# Altium PCB PCB_conectores.PcbDoc
Units mil, origin at the board's own origin, x right, y up, seen from the top; angles counter-clockwise.
Board outline 1968.5 x 1968.5 mil, 2 copper layers (Top Layer, Bottom Layer); 17 components, 10 nets, 60 pads, 18 vias.
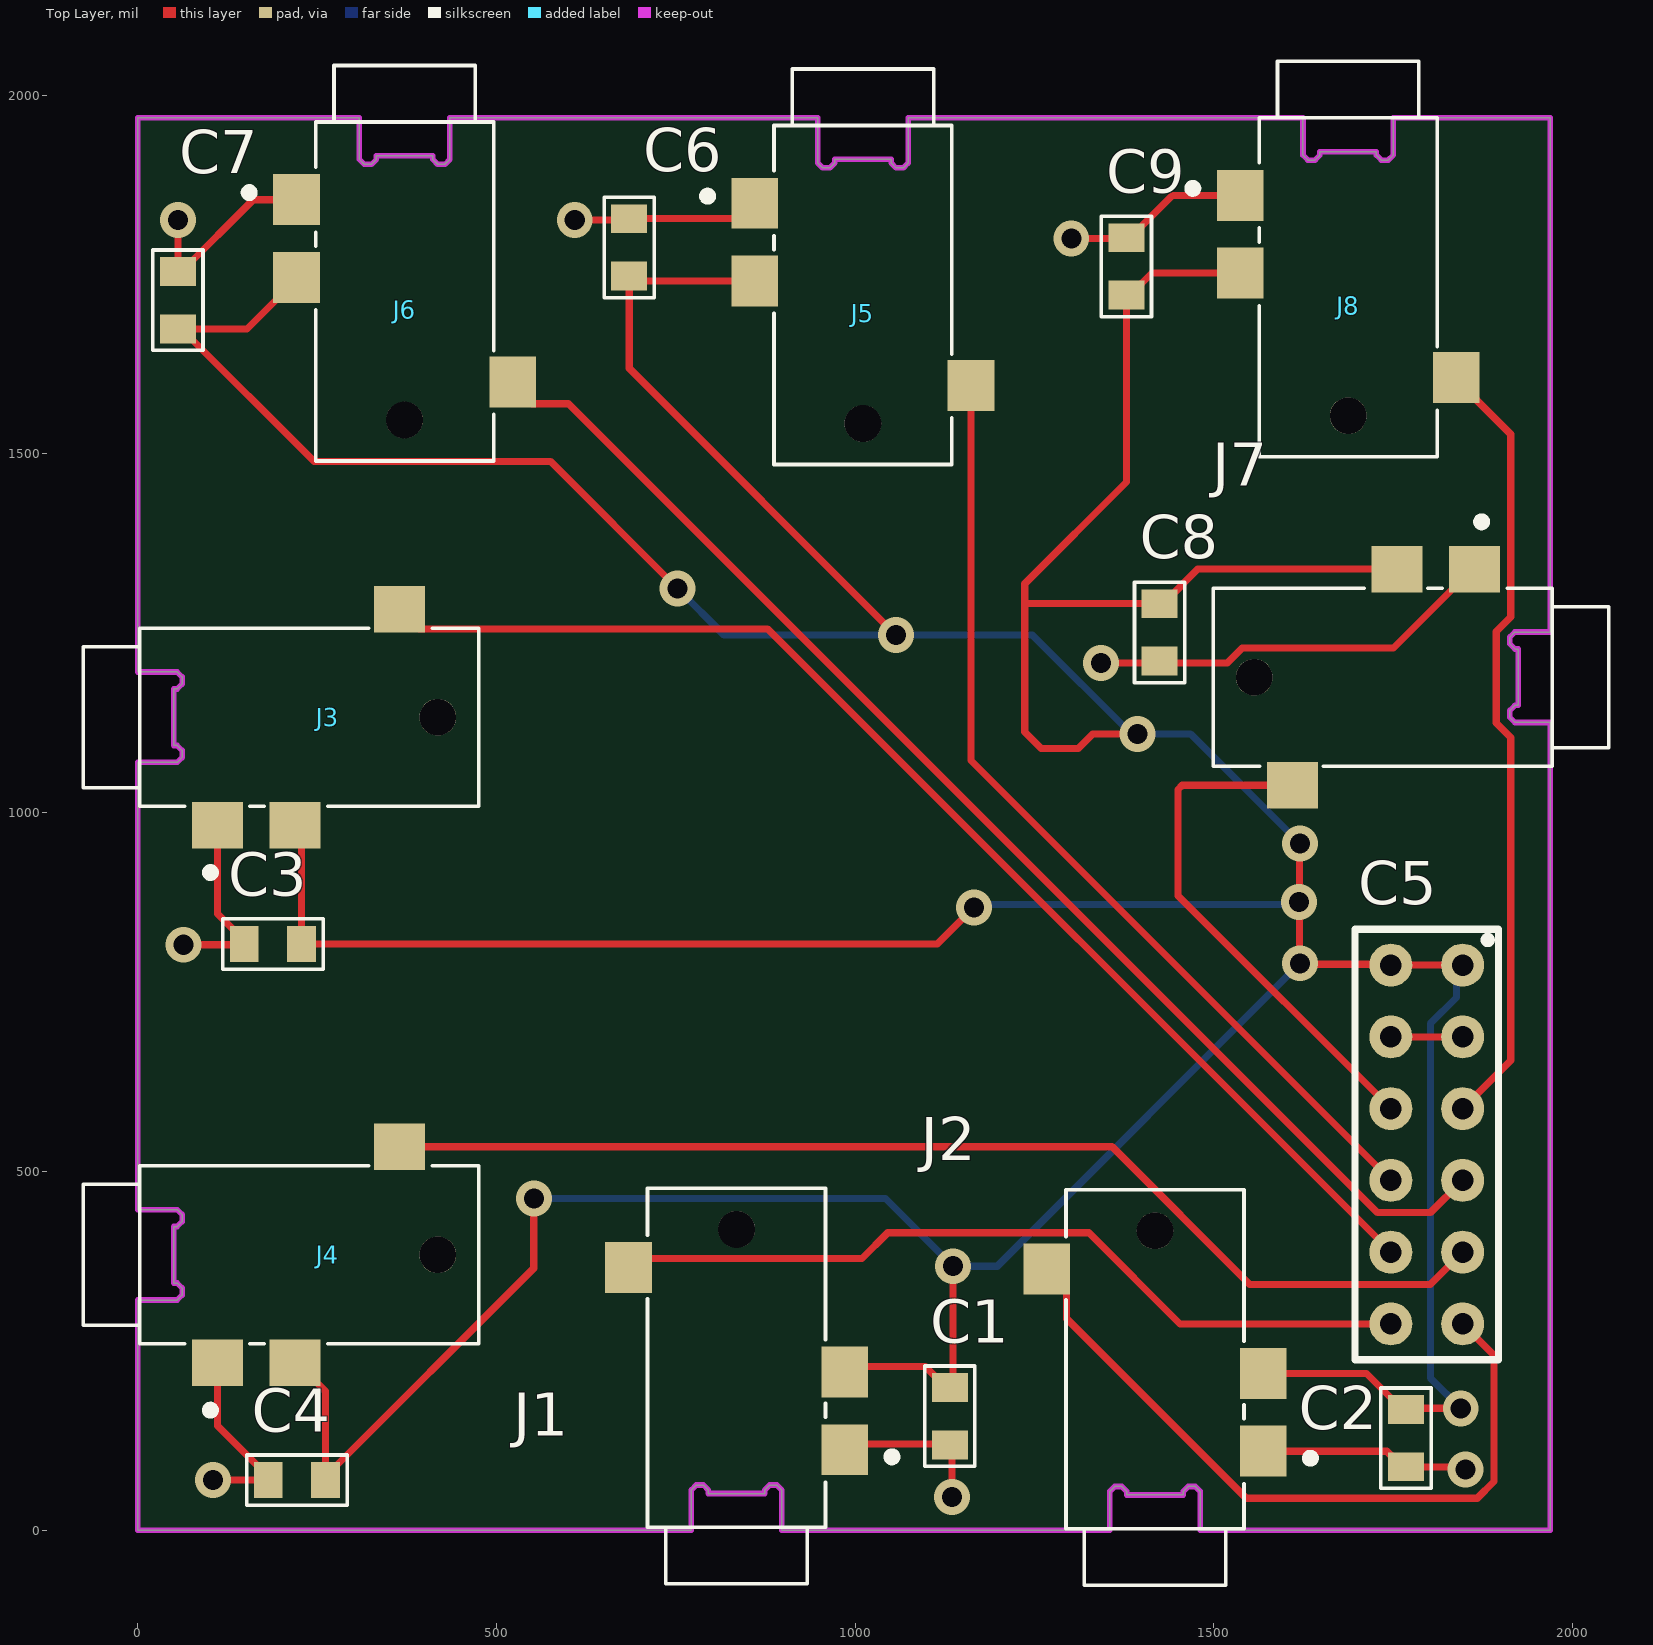
[diagram p0: Top Layer view]
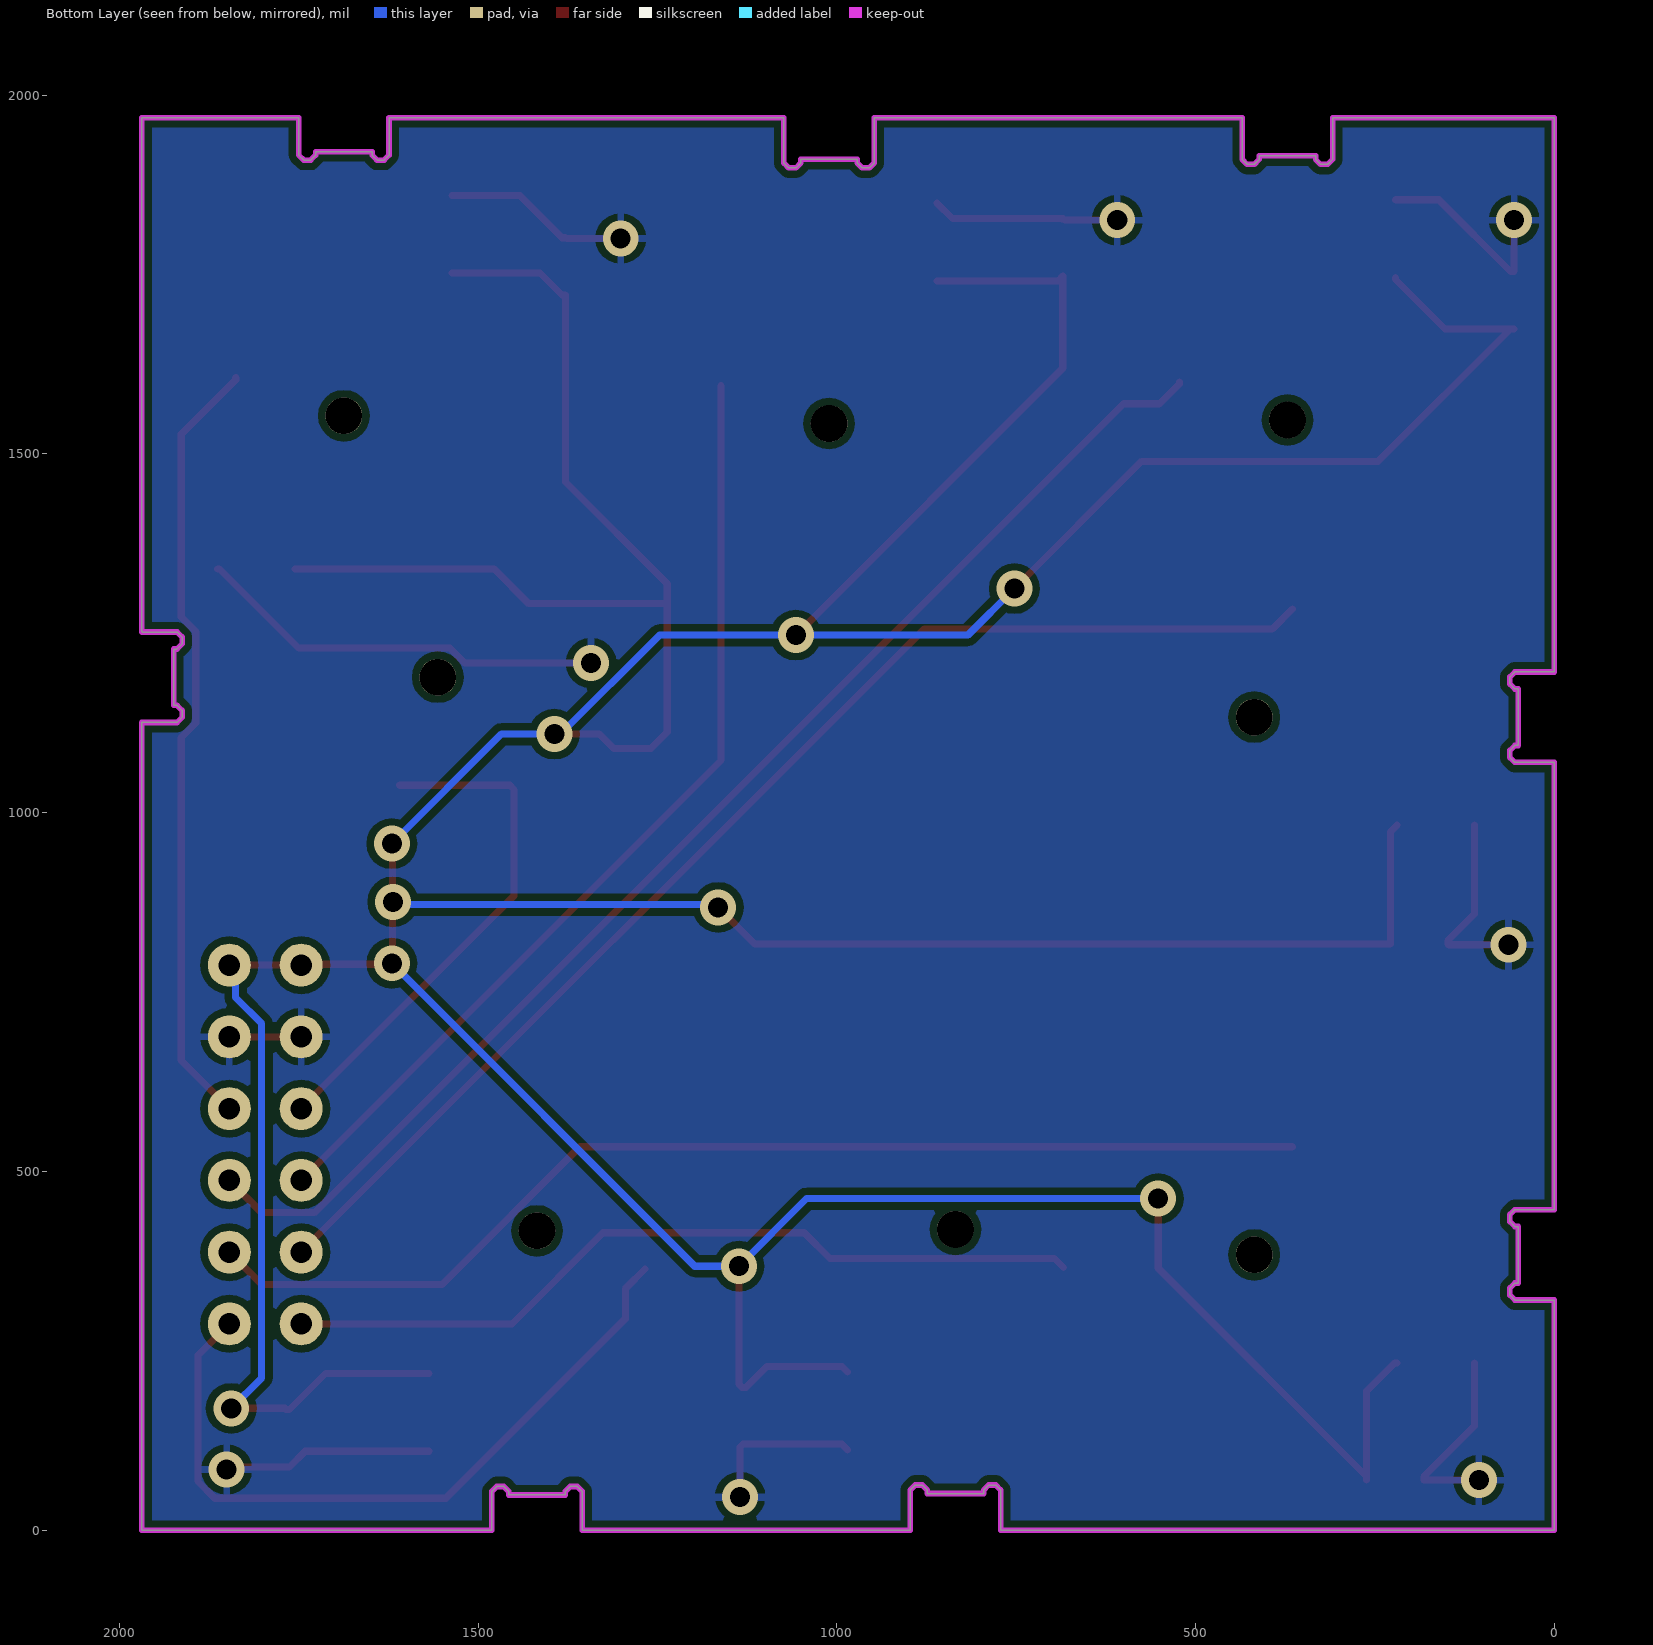
[diagram p1: Bottom Layer view, seen from below]

## Layer stack, top to bottom
Top Solder: solder mask 0.4, Solder Resist, Dk 3.5
Top Layer: signal copper 1.4
Dielectric 1: dielectric 12.6, FR-4, Dk 4.8
Bottom Layer: signal copper 1.4
Bottom Solder: solder mask 0.4, Solder Resist, Dk 3.5

## Board outline
1924.21,1228.1 1919.54,1228.1 1912.4,1235.24 1912.4,1244.83 1919.29,1251.72 1968.26,1251.72 1968.5,1251.97 1968.5,1968.5 1750,1968.5 1750,1916.58 1742.86,1909.45 1733.27,1909.45 1726.38,1916.34 1726.38,1921.26 1647.64,1921.26 1647.64,1916.34 1640.75,1909.45 1630.91,1909.45 1624.02,1916.34 1624.02,1968.5 1073.82,1968.5 1073.82,1905.51 1066.93,1898.62 1057.09,1898.62 1050.2,1905.51 1050.2,1910.43 971.46,1910.43 971.46,1905.51 964.57,1898.62 954.72,1898.62 947.83,1905.51 947.83,1968.5 435.04,1968.5 435.04,1910.43 428.15,1903.54 418.31,1903.54 411.42,1910.43 411.42,1915.35 332.68,1915.35 332.68,1910.43 325.79,1903.54 315.94,1903.54 309.06,1910.43 309.06,1968.5 0,1968.5 0,1196.11 55.12,1196.11 62.01,1189.22 62.01,1179.38 55.12,1172.49 50.13,1172.49 50.13,1093.75 55.12,1093.75 62.01,1086.86 62.01,1077.02 55.12,1070.13 50.13,1070.15 0.02,1070.15 0,1070.13 0,446.85 55.12,446.85 62.01,439.96 62.01,430.12 55.12,423.23 50.2,423.23 50.2,344.49 55.12,344.49 62.01,337.6 62.01,327.76 55.12,320.87 0,320.87 0,0 771.65,0 771.65,56.1 778.54,62.99 788.39,62.99 795.28,56.1 795.28,51.18 874.02,51.18 874.02,56.1 880.91,62.99 890.75,62.99 897.64,56.1 897.64,0 1354.82,0 1354.82,54.13 1361.71,61.02 1371.56,61.02 1378.44,54.13 1378.44,49.21 1457.18,49.21 1457.18,54.13 1464.07,61.02 1473.92,61.02 1480.81,54.13 1480.81,0 1968.5,0 1968.5,1125.74 1919.54,1125.74 1912.4,1132.87 1912.4,1142.47 1919.54,1149.61 1924.21,1149.61

## Design rules (kind name [scope] priority, off if disabled: settings)
Clearance [All] p1: gap=10 ignorepadtopadclearanceinfootprint=FALSE except(0: Arc-Hole Track-Hole SMDPad-Hole THPad-Hole Via-Hole Fill-Hole Poly-Hole Region-Hole Text-Hole)
DiffPairsRouting [All] p1: maxlimit=10 minlimit=3.5 mostfreqgap=10 toplayer_minwidth=3.5 toplayer_maxwidth=15 toplayer_prefwidth=15 bottomlayer_minwidth=3.5 bottomlayer_maxwidth=15 bottomlayer_prefwidth=15 maxuncoupledlength=500
HoleSize [All] p1: absolutevalues=TRUE maxlimit=100 minlimit=0.79 maxpercent=80.000 minpercent=20.000
PolygonConnect [All] p1: connectstyle=Relief reliefconductorwidth=10 reliefentries=4 polygonreliefangle="90 Angle" airgapwidth=10
RoutingVias [All] p1: holewidth=28 width=50 viastyle="Through Hole" minholewidth=28 minwidth=50 maxholewidth=28 maxwidth=50
SolderMaskExpansion [All] p1: expansion=4 istentingtop=FALSE
Width [All] p1: maxlimit=10 minlimit=3.5 preferedwidth=10 minimp=50.000000 maximp=50.000000 favimp=50.000000
28 further rules are at their usual default settings.

## Components (designator, comment, footprint, x,y, rotation, side; value= is the part's Value field where it differs from the comment)
C1 "1u" 0805C-GENERIC 1131.89,128.94 r90 top
C2 "1u" 0805C-GENERIC 1767.72,98.31 r90 top
C3 "1u" 0805C-GENERIC 158.46,816.93 r0 top
C4 "1u" 0805C-GENERIC 191.93,69.88 r0 top
C5 "PMOD" PMOD 1746.56,387.62 r0 top
C6 "1u" 0805C-GENERIC 685.04,1817.91 r270 top
C7 "1u" 0805C-GENERIC 56.1,1744.21 r270 top
C8 "1u" 0805C-GENERIC 1424.21,1221.34 r90 top
C9 "1u" 0805C-GENERIC 1377.95,1791.34 r270 top
J1 "SJ2-35953A-SMT-TR" CUI_SJ2-35953A-SMT-TR 834.65,240.16 r90 top
J2 "SJ2-35953A-SMT-TR" CUI_SJ2-35953A-SMT-TR 1417.83,238.19 r90 top
J3 "SJ2-35953A-SMT-TR" CUI_SJ2-35953A-SMT-TR 239.17,1133.11 r0 top
J4 "SJ2-35953A-SMT-TR" CUI_SJ2-35953A-SMT-TR 239.17,383.86 r0 top
J5 "SJ2-35953A-SMT-TR" CUI_SJ2-35953A-SMT-TR 1010.83,1721.46 r270 top
J6 "SJ2-35953A-SMT-TR" CUI_SJ2-35953A-SMT-TR 372.05,1726.38 r270 top
J7 "SJ2-35953A-SMT-TR" CUI_SJ2-35953A-SMT-TR 1735.24,1188.84 r180 top
J8 "SJ2-35953A-SMT-TR" CUI_SJ2-35953A-SMT-TR 1687.01,1732.28 r270 top

## Footprints (in the part's own frame and the unit in brackets; to place one, negate y for a bottom-side part, rotate by r counter-clockwise, add the part's x,y. Pads: shape width x height; smd on the part's side, far side on the other; paste and mask are expansions set on the pad)
0805C-GENERIC [mil] "CAPACITOR 0805"
  rect 40x50 smd: 1(-10,0) 2(70,0)
  silkscreen extent -40,-35 100,35, body extent -11,-25 70,25, height 26
CUI_SJ2-35953A-SMT-TR [mm]
  rect 1.8x1.65 smd: 1(-3.25,-3.825) 2(3.2,3.825) 3(-0.5,-3.825)
  round 1.3 hole 1.3 unplated: ""(4.55,0)
  silkscreen extent -8,-5.65 6,3.15
PMOD [mil]
  round 60 hole 30: 1(0,-100) 2(0,0) 3(0,100) 4(0,200) 5(0,300) 6(0,400) 7(100,-100) 8(100,0) 9(100,100) 10(100,200) 11(100,300) 12(100,400)
  silkscreen extent -50,-150 150,450

## Part data
C1 C2 C3 C4 C6 C7 C8 C9: library part C0805-GENERIC, "GENERIC CAPACITOR NON POLARISED0603"
J1 J2 J3 J4 J5 J6 J7 J8: "3.5 mm, Stereo, Right Angle, Surface Mount _SMT_, Audio Jack Connector", Package=None, Availability=Unavailable, CUI_purchase_URL=https://www.cuidevices.com/product/interconnect/connectors/audio-connectors/jacks/sj2-3595x-smt-series?utm_source=snapeda.com&utm_medium=referral&utm_campaign=snapedaBOM, MF="CUI Devices", MP=SJ2-35953A-SMT-TR, Price=None, SnapEDA_Link=https://www.snapeda.com/parts/SJ2-35953A-SMT-TR/CUI%20Devices/view-part/701771/?ref=snap

## Via types
v1: diameter 50, hole 28, Top Layer to Bottom Layer, 18 vias

## Nets (pads, with @x,y where several pads share a name; then routed paths per layer and width w, separated by ;. In a path a pad name is that pad's centre, name@x,y a point inside that pad or via, vN(x,y) a via of type N, cw(c..) or ccw(c..) an arc to the next point about the centre after c; other vN are vias at no path point)
GND: C1.1 C2.1 C3.1 C4.1 C5.5 C5.11 C6.1 C7.1 C8.1 C9.1 J1.1 J2.1 J3.1 J4.1 J5.1 J6.1 J7.1 J8.1 | length 2526.2
  Top Layer w10: v1(56.1,1825.79) C7.1 61.1,1754.21 161.22,1854.33 J6.1 ; v1(63.98,815.94) 147.48,815.94 C3.1 148.46,821.93 111.22,859.17 J3.1 ; v1(105.32,69.88) C4.1 181.93,74.88 111.22,145.59 J4.1 ; v1(609.25,1825.79) 682.92,1825.79 C6.1 838.74,1827.91 J5.1 ; J1.1 993.11,120.08 1130.75,120.08 C1.1 1134.84,115.99 v1(1134.84,46.26) ; v1(1301.18,1800.2) 1376.81,1800.2 C9.1 1382.95,1801.34 1441.85,1860.24 J8.1 ; v1(1342.52,1208.66) 1518.53,1208.66 1539.29,1229.43 1750.23,1229.43 1860.24,1339.43 J7.1 ; J2.1 1740.79,110.24 1762.72,88.31 C2.1 1846.73,88.31 v1(1850.39,84.65) ; C5.5 C5.11
NetC5_1: C5.1 J1.2 | length 1135.2
  Top Layer w10: J1.2 696.62,378.7 1009.38,378.7 1045.29,414.61 1325.66,414.61 1452.65,287.62 C5.1
NetC5_2: C5.2 J3.2 | length 1752.6
  Top Layer w10: J3.2 392.64,1256.23 877.95,1256.23 C5.2
NetC5_3: C5.3 J5.2 | length 1350.2
  Top Layer w10: J5.2 1161.42,1072.76 C5.3
NetC5_4: C5.4 J7.2 | length 729.6
  Top Layer w10: J7.2 1455.66,1038.24 1449.8,1032.39 1449.8,884.37 C5.4
NetC5_7: C5.7 J2.2 | length 1027.4
  Top Layer w10: J2.2 1294.72,336.69 1294.72,294.81 1544.88,44.65 1866.96,44.65 1890.39,68.08 1890.39,243.78 C5.7
NetC5_8: C5.8 J4.2 | length 1579.5
  Top Layer w10: J4.2 1358.1,534.45 1549.94,342.62 1801.56,342.62 C5.8
NetC5_9: C5.9 J6.2 | length 1823.9
  Top Layer w10: J6.2 522.64,1597.44 550.12,1569.96 600.57,1569.96 1727.92,442.62 1801.56,442.62 C5.9
NetC5_10: C5.10 J8.2 | length 1094.6
  Top Layer w10: J8.2 1837.6,1603.35 1913.62,1527.32 1913.62,1272.83 1893.46,1252.68 1893.46,1125.03 1913.62,1104.87 1913.62,654.68 C5.10
VCC: C1.2 C2.2 C3.2 C4.2 C5.6 C5.12 C6.2 C7.2 C8.2 C9.2 J1.3 J2.3 J3.3 J4.3 J5.3 J6.3 J7.3 J8.3 | length 9674.4
  Top Layer w10: C7.2 C7.2@61.1,1674.21 ; J4.3 222.44,233.27 261.93,193.78 C4.2@261.93,74.88 ; J3.3 228.46,973.55 C3.2 1114.27,816.93 v1(1165.34,868) ; J6.3 221.46,1743.11 152.56,1674.21 C7.2@61.1,1674.21 ; C4.2 C4.2@261.93,74.88 ; v1(552.15,462.24) 552.15,365.11 C4.2@261.93,74.88 ; v1(752.45,1312.39) 575.21,1489.63 245.69,1489.63 C7.2@61.1,1674.21 ; J5.3 691.81,1741.14 C6.2 685.04,1619.47 v1(1057.07,1247.43) ; J1.3 992.84,228.08 1097.75,228.08 1126.89,198.94 C1.2 1136.31,203.35 v1(1136.31,368) ; v1(1393.6,1109.52) 1331.17,1109.52 1310.96,1089.32 1259.35,1089.32 1236.22,1112.45 1236.22,1288.88 ; J8.3 1413.58,1751.97 1382.95,1721.34 C9.2 1377.95,1460.88 1236.22,1319.14 1236.22,1288.88 ; J2.3 1712.52,218.5 1762.72,168.31 C2.2 1769.33,169.92 v1(1843.98,169.92) ; v1(1620.08,956.94) 1619.34,956.2 1619.34,876.48 v1(1618.6,875.74) 1619.34,875 1619.34,790.85 v1(1620.08,790.11) 1621.32,788.86 1745.31,788.86 C5.6 C5.12 ; J7.3 1477.3,1339.43 1429.21,1291.34 C8.2 1238.68,1291.34 1236.22,1288.88
  Bottom Layer w10: v1(552.15,462.24) 1042.06,462.24 v1(1136.31,368) 1197.97,368 v1(1620.08,790.11) ; v1(752.45,1312.39) 817.41,1247.43 v1(1057.07,1247.43) 1247.18,1247.43 1385.09,1109.52 v1(1393.6,1109.52) 1467.5,1109.52 v1(1620.08,956.94) ; v1(1165.34,868) 1169.21,871.87 1614.73,871.87 v1(1618.6,875.74) ; v1(1843.98,169.92) 1801.56,212.35 1801.56,706.26 1837.92,742.62 1837.92,778.98 C5.12
pads on no net: J1. J2. J3. J4. J5. J6. J7. J8.
copper on no net: | length 0.5
  Top Layer w10: 1850.39,84.15 1850.39,84.65

## Polygon pours and split planes (outlines as drawn)
GND on Bottom Layer "GND_L02_P000" (solid, remove dead copper, pour order 0): 0,0 0,1968.5 1968.5,1968.5 1968.5,0

## Keep-outs
Keep-Out Layer:
  lines w7.87: 0,1070.13 0,446.85 55.12,446.85 62.01,439.96 62.01,430.12 55.12,423.23 50.2,423.23 50.2,344.49 55.12,344.49 62.01,337.6 62.01,327.76 55.12,320.87 0,320.87 0,0 771.65,0 771.65,56.1 778.54,62.99 788.39,62.99 795.28,56.1 795.28,51.18 874.02,51.18 874.02,56.1 880.91,62.99 890.75,62.99 897.64,56.1 897.64,0 1354.82,0 1354.82,54.13 1361.71,61.02 1371.56,61.02 1378.44,54.13 1378.44,49.21 1457.18,49.21 1457.18,54.13 1464.07,61.02 1473.92,61.02 1480.81,54.13 1480.81,0 1968.5,0 1968.5,1125.74 1919.54,1125.74 1912.4,1132.87 1912.4,1142.47 1919.54,1149.61 1924.21,1149.61 1924.21,1228.1 1919.54,1228.1 1912.4,1235.24 1912.4,1244.83 1919.29,1251.72 1968.26,1251.72 1968.5,1251.97 1968.5,1968.5 1750,1968.5 1750,1916.58 1742.86,1909.45 1733.27,1909.45 1726.38,1916.34 1726.38,1921.26 1647.64,1921.26 1647.64,1916.34 1640.75,1909.45 1630.91,1909.45 1624.02,1916.34 1624.02,1968.5 1073.82,1968.5 1073.82,1905.51 1066.93,1898.62 1057.09,1898.62 1050.2,1905.51 1050.2,1910.43 971.46,1910.43 971.46,1905.51 964.57,1898.62 954.72,1898.62 947.83,1905.51 947.83,1968.5 435.04,1968.5 435.04,1910.43 428.15,1903.54 418.31,1903.54 411.42,1910.43 411.42,1915.35 332.68,1915.35 332.68,1910.43 325.79,1903.54 315.94,1903.54 309.06,1910.43 309.06,1968.5 0,1968.5 0,1196.11 55.12,1196.11 62.01,1189.22 62.01,1179.38 55.12,1172.49 50.13,1172.49 50.13,1093.75 55.12,1093.75 62.01,1086.86 62.01,1077.02 55.12,1070.13 50.13,1070.15 0.02,1070.15 ; 0,1070.13 0.02,1070.15